# Altium PCB Shield.pcbdoc (part 2 of 2)
Units mm, origin at the board's own origin, x right, y up, seen from the top; angles counter-clockwise.
Board outline 57.12 x 53.38 mm, 2 copper layers (Top Layer, Bottom Layer); 40 components, 41 nets, 141 pads, 717 vias.
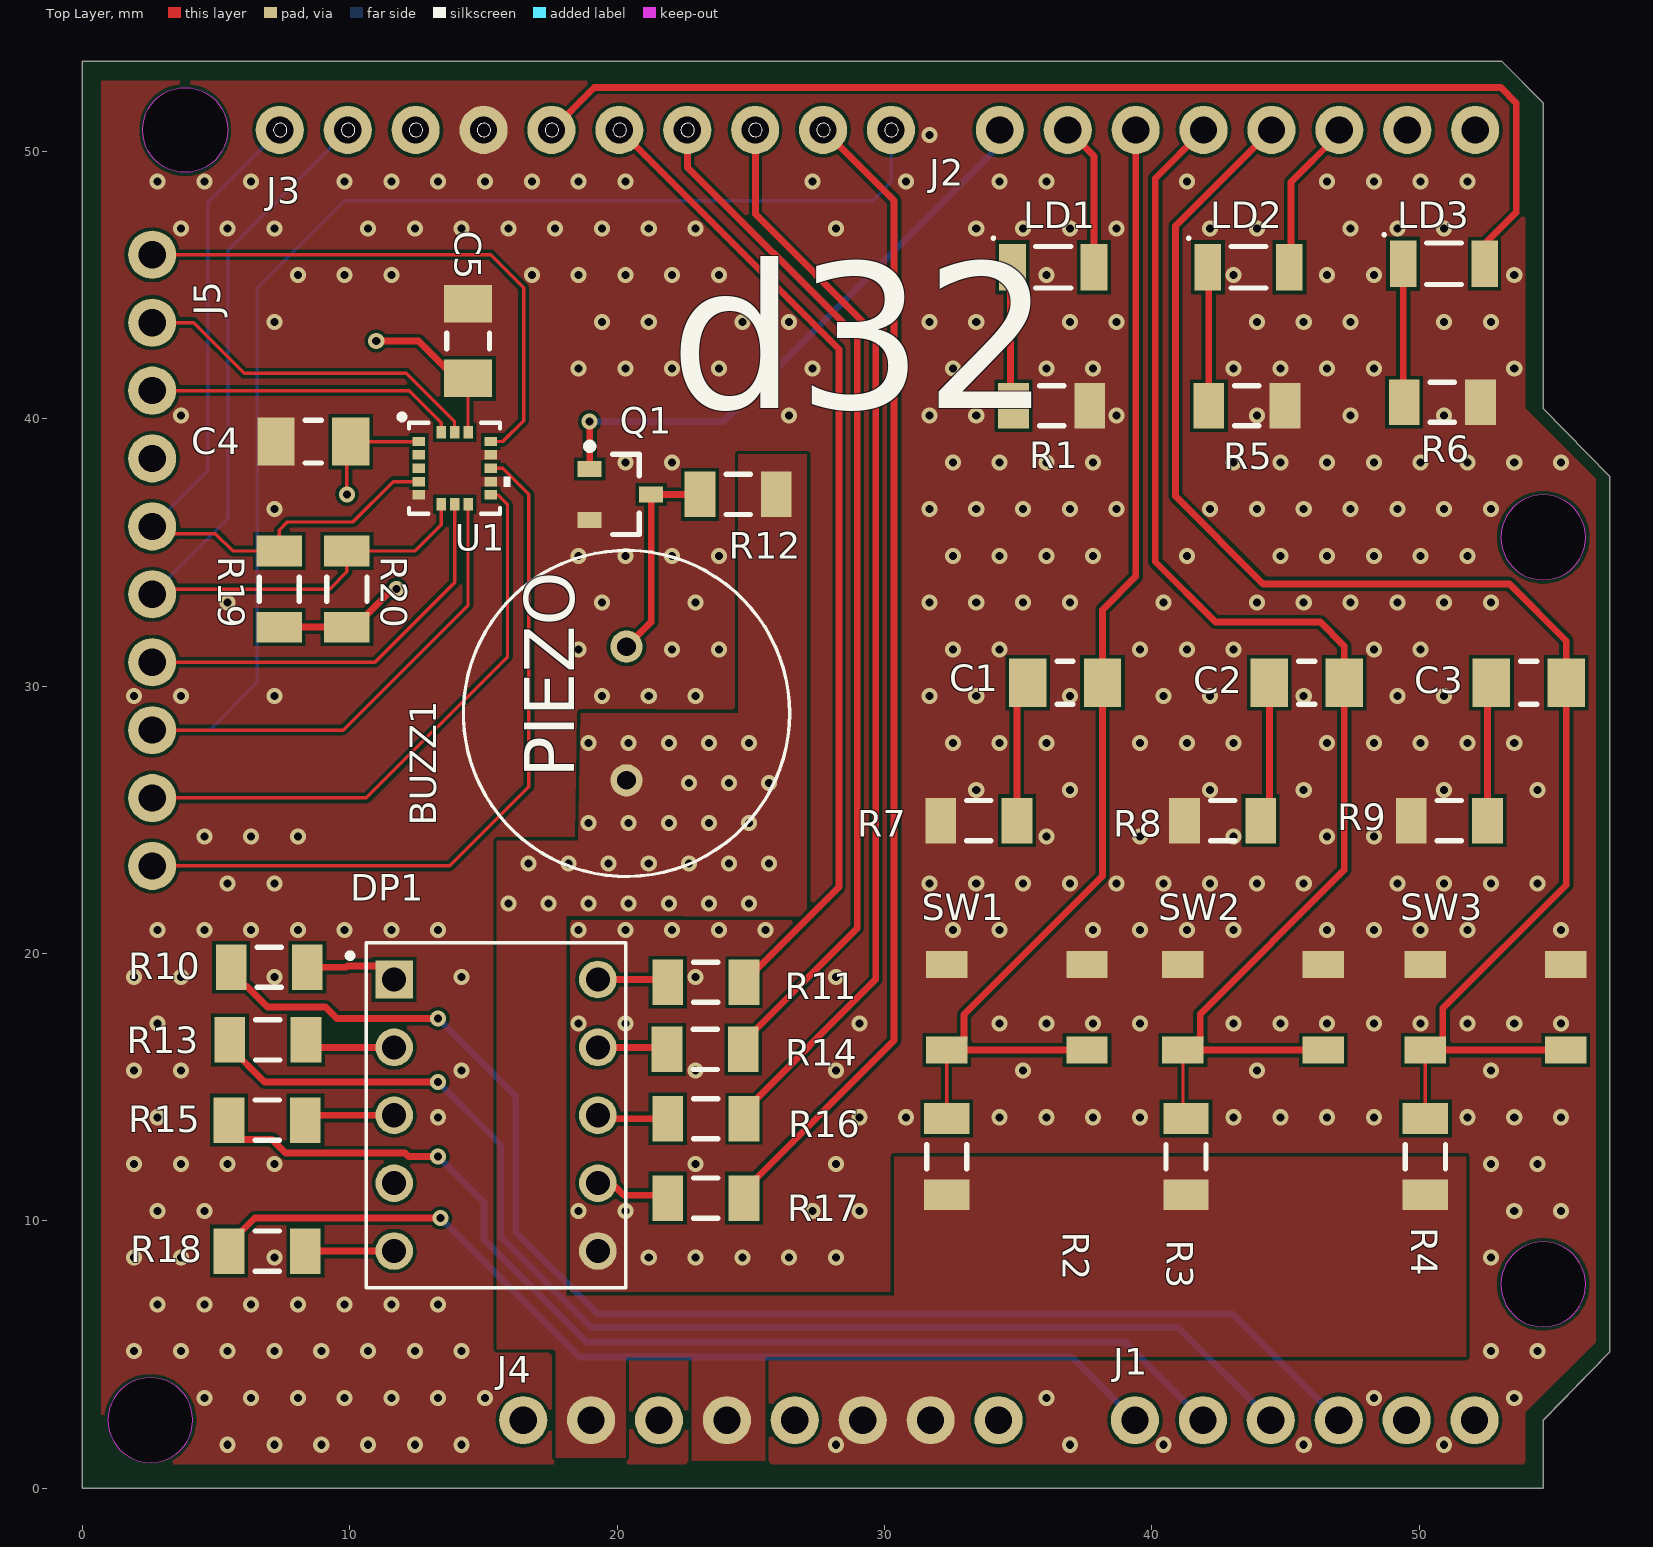
[diagram p0: Top Layer view]

## Via types
v1: diameter 0.6, hole 0.3, Top Layer to Bottom Layer, tented both sides, 717 vias

## Nets (pads, with @x,y where several pads share a name; then routed paths per layer and width w, separated by ;. In a path a pad name is that pad's centre, name@x,y a point inside that pad or via, vN(x,y) a via of type N, cw(c..) or ccw(c..) an arc to the next point about the centre after c; other vN are vias at no path point) (continued)
YELLOWLED: J3.6 LD3.1 | length 43.5
  Top Layer w0.254: J3.6@17.556,50.8 19.143,52.387 53.054,52.387 53.628,51.814 53.628,47.715 52.452,46.539 LD3.1
pads on no net: DP1.4 J1.5 J1.6 J2.1 J2.2 J3.8 J4.1 J4.3 J4.5 J4.8 J5.4 U1.2 U1.3

## Polygon pours and split planes (outlines as drawn)
GND on Top Layer "Top Layer-GND" (solid, pour order 36): 53.969,0.87 53.969,2.83 56.6,5.462 56.6,37.76 53.969,40.391 53.969,52.646 0.694,52.646 0.694,0.895
+3V3 on Top Layer "Top Layer-+3V3" (solid, pour order 32): 51.752,12.4 51.752,4.911 25.542,4.903 25.542,1.014 22.792,1.014 22.792,4.902 20.319,4.902 20.319,1.133 17.7,1.133 17.7,5.1 17.6,5.2 15.5,5.2 15.5,24.218 18.542,24.218 18.631,29.007 24.527,28.977 24.527,38.668 27.1,38.668 27.1,21.371 18.1,21.4 18.1,7.2 30.36,7.2 30.36,12.4
GND on Bottom Layer "Bottom Layer-GND" (solid, pour order 42): 53.969,0.87 53.969,2.83 56.6,5.462 56.6,37.76 53.969,40.391 53.969,52.646 0.694,52.646 0.694,0.895
+3V3 on Bottom Layer "Bottom Layer-+3V3" (solid, pour order 34): 27.1,29.007 27.1,21.371 27.071,21.4 8.939,21.4 8.939,44 17.556,44 17.556,29.007

## Other copper
Top Layer:
  region: 0,53.4
  region net +3V3: 25.6,3.422

## Silkscreen, mask and mechanical layers (free items; w line width, h text height)
Top Overlay:
  circle w0.013: c30.256,50.8 r0.254
  circle w0.013: c27.716,50.8 r0.254
  circle w0.013: c25.176,50.8 r0.254
  circle w0.013: c22.636,50.8 r0.254
  circle w0.013: c20.096,50.8 r0.254
  circle w0.013: c17.556,50.8 r0.254
  circle w0.013: c15.016,50.8 r0.254
  circle w0.013: c12.476,50.8 r0.254
  circle w0.013: c9.936,50.8 r0.254
  circle w0.013: c7.396,50.8 r0.254
  text "d32" at 21.973,38.117 h12
Bottom Overlay:
  lines w0.013: -99.562,-84.197 ccw(c-104.184,1582.023) -99.508,-84.197 ; -43.488,-77.551 cw(c-35.852,-2738.975) -43.264,-77.55 ; -37.522,-82.332 cw(c-39.303,-459.959) -37.489,-82.332 ; -24.107,-79.882 ccw(c-10.494,2646.988) -23.846,-79.883 ; 39.046,-79.883 ccw(c25.695,2646.988) 39.308,-79.882 ; 52.69,-82.332 cw(c54.504,-459.959) 52.723,-82.332 ; 58.465,-77.55 cw(c51.053,-2738.975) 58.689,-77.551 ; 114.709,-84.197 ccw(c119.385,1582.023) 114.762,-84.197
  text "a" at 53.173,30.924 h20
Mechanical 1:
  circle w0.013: c7.396,50.8 r0.254
  circle w0.013: c9.936,50.8 r0.254
  circle w0.013: c12.476,50.8 r0.254
  circle w0.013: c15.016,50.8 r0.254
  circle w0.013: c17.556,50.8 r0.254
  circle w0.013: c20.096,50.8 r0.254
  circle w0.013: c22.636,50.8 r0.254
  circle w0.013: c25.176,50.8 r0.254
  circle w0.013: c27.716,50.8 r0.254
  circle w0.013: c30.256,50.8 r0.254
  circle w0.013: c34.29,50.8 r0.254
  circle w0.013: c36.83,50.8 r0.254
  circle w0.013: c39.37,50.8 r0.254
  circle w0.013: c41.91,50.8 r0.254
  circle w0.013: c44.45,50.8 r0.254
  circle w0.013: c46.99,50.8 r0.254
  circle w0.013: c49.53,50.8 r0.254
  circle w0.013: c52.07,50.8 r0.254
  circle w0.013: c16.51,2.54 r0.254
  circle w0.013: c19.05,2.54 r0.254
  circle w0.013: c21.59,2.54 r0.254
  circle w0.013: c24.13,2.54 r0.254
  circle w0.013: c26.67,2.54 r0.254
  circle w0.013: c29.21,2.54 r0.254
  circle w0.013: c31.75,2.54 r0.254
  circle w0.013: c34.29,2.54 r0.254
  circle w0.013: c39.37,2.54 r0.254
  circle w0.013: c41.91,2.54 r0.254
  circle w0.013: c44.45,2.54 r0.254
  circle w0.013: c46.99,2.54 r0.254
  circle w0.013: c49.53,2.54 r0.254
  circle w0.013: c52.07,2.54 r0.254
  circle w0.013: c2.54,2.54 r1.587
  circle w0.013: c54.64,7.62 r1.587
  circle w0.013: c54.64,35.56 r1.587
  circle w0.013: c3.84,50.8 r1.587
  lines w0.013: 0,0 0,53.375 53.079,53.375 54.64,51.814 54.64,40.386 57.12,37.846 57.12,5.08 54.64,2.54 54.64,0 0,0

## Text inside footprints (layer, text, board x,y; h text height)
BUZZ1: Top Overlay "PIEZO" at 18.399,26.573 h1.88 r90